# Altium PCB EDP_new_pcb.PcbDoc
Units mm, origin at the board's own origin, x right, y up, seen from the top; angles counter-clockwise.
Board outline 45 x 45 mm, 2 copper layers (Top Layer, Bottom Layer); 31 components, 22 nets, 150 pads, 38 vias.
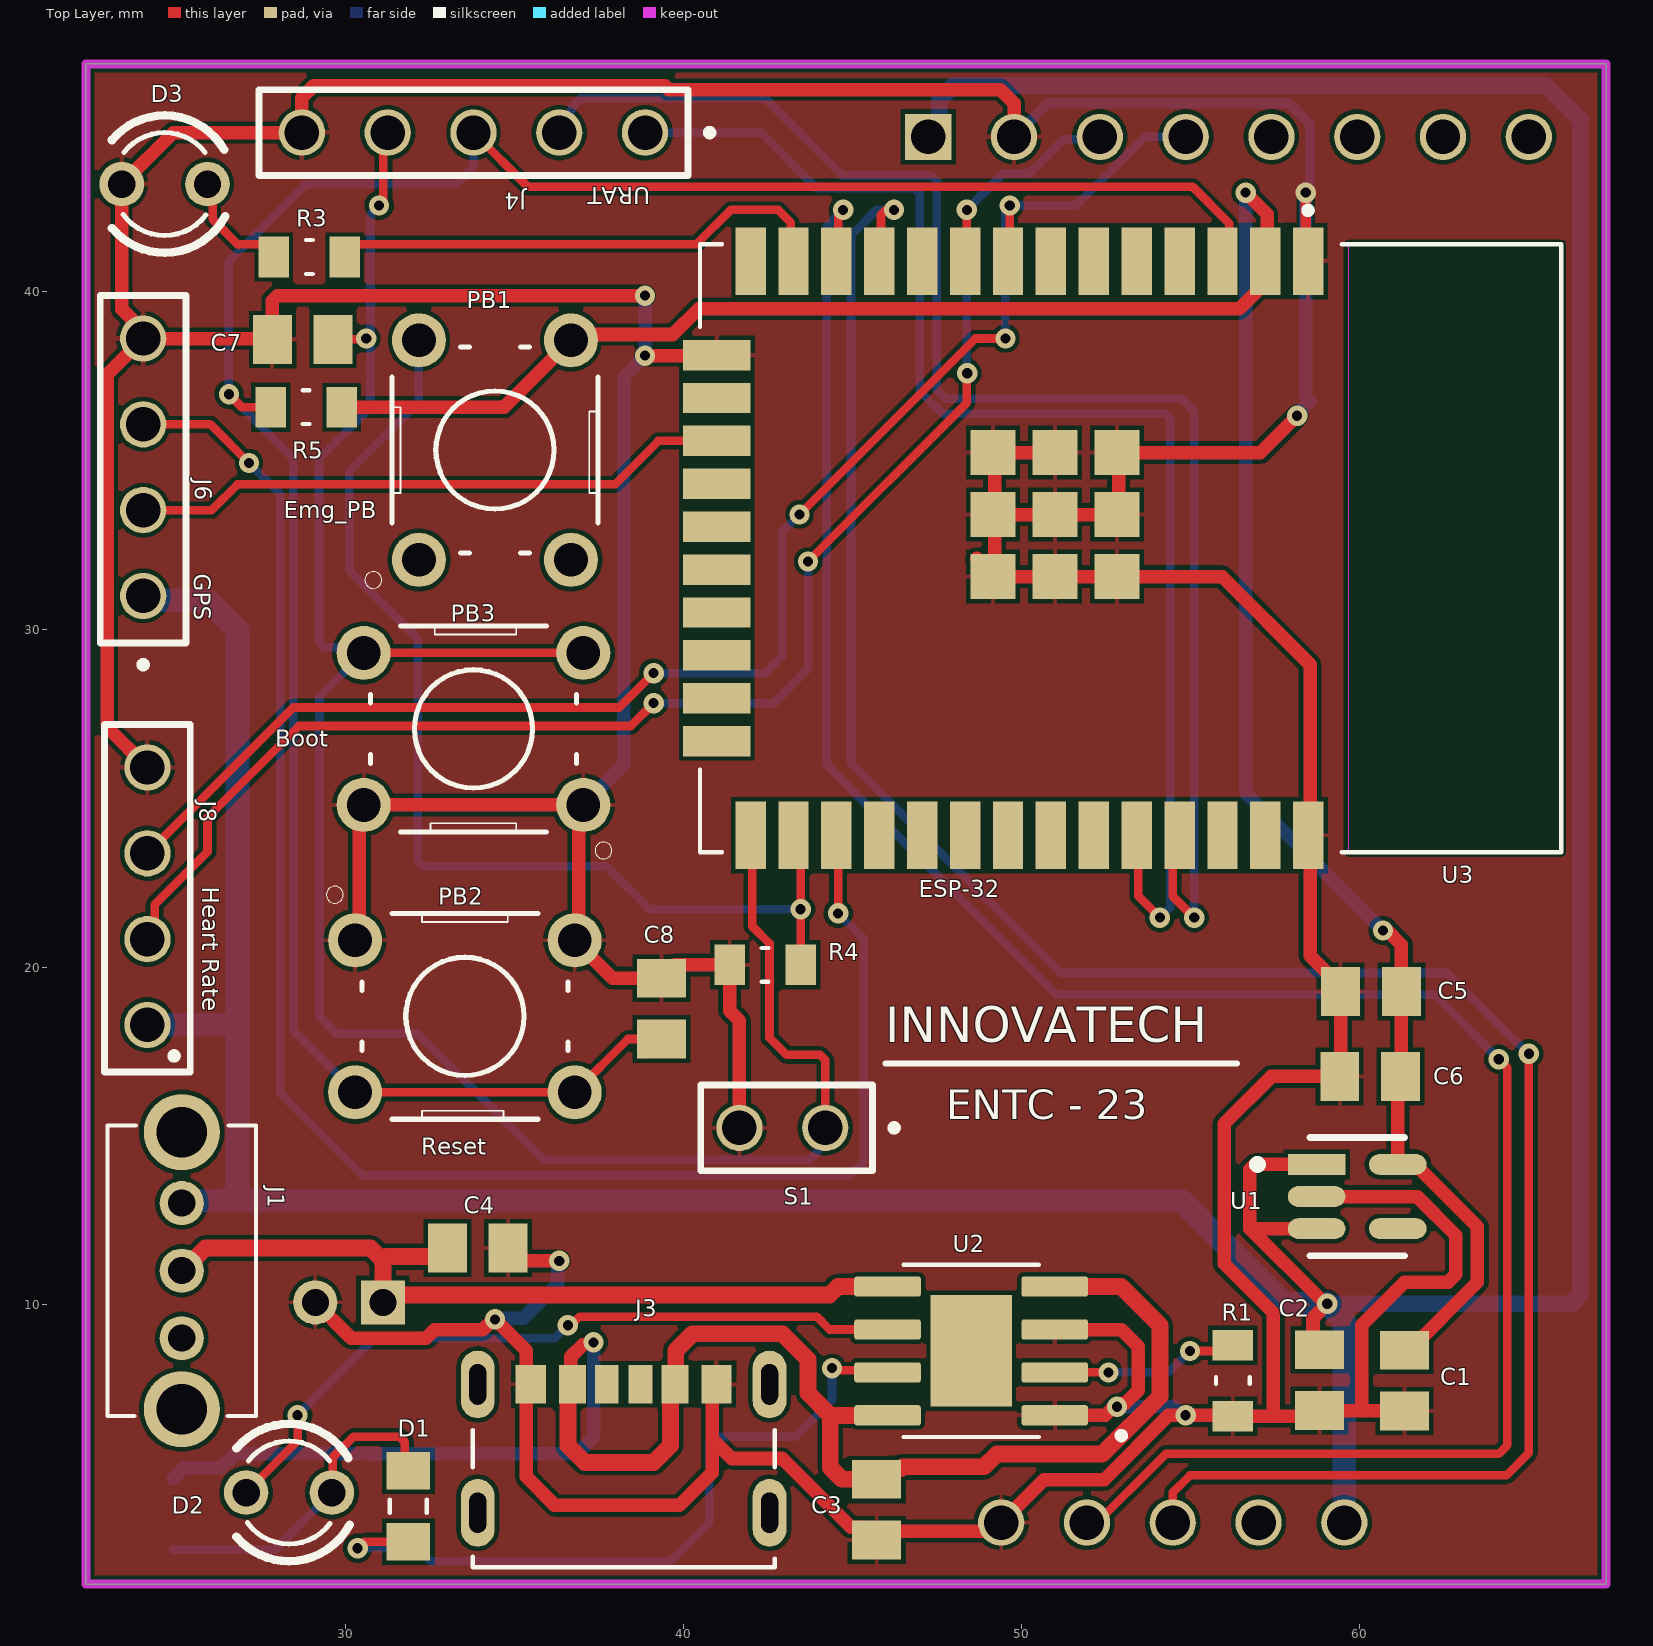
[diagram p0: Top Layer view]
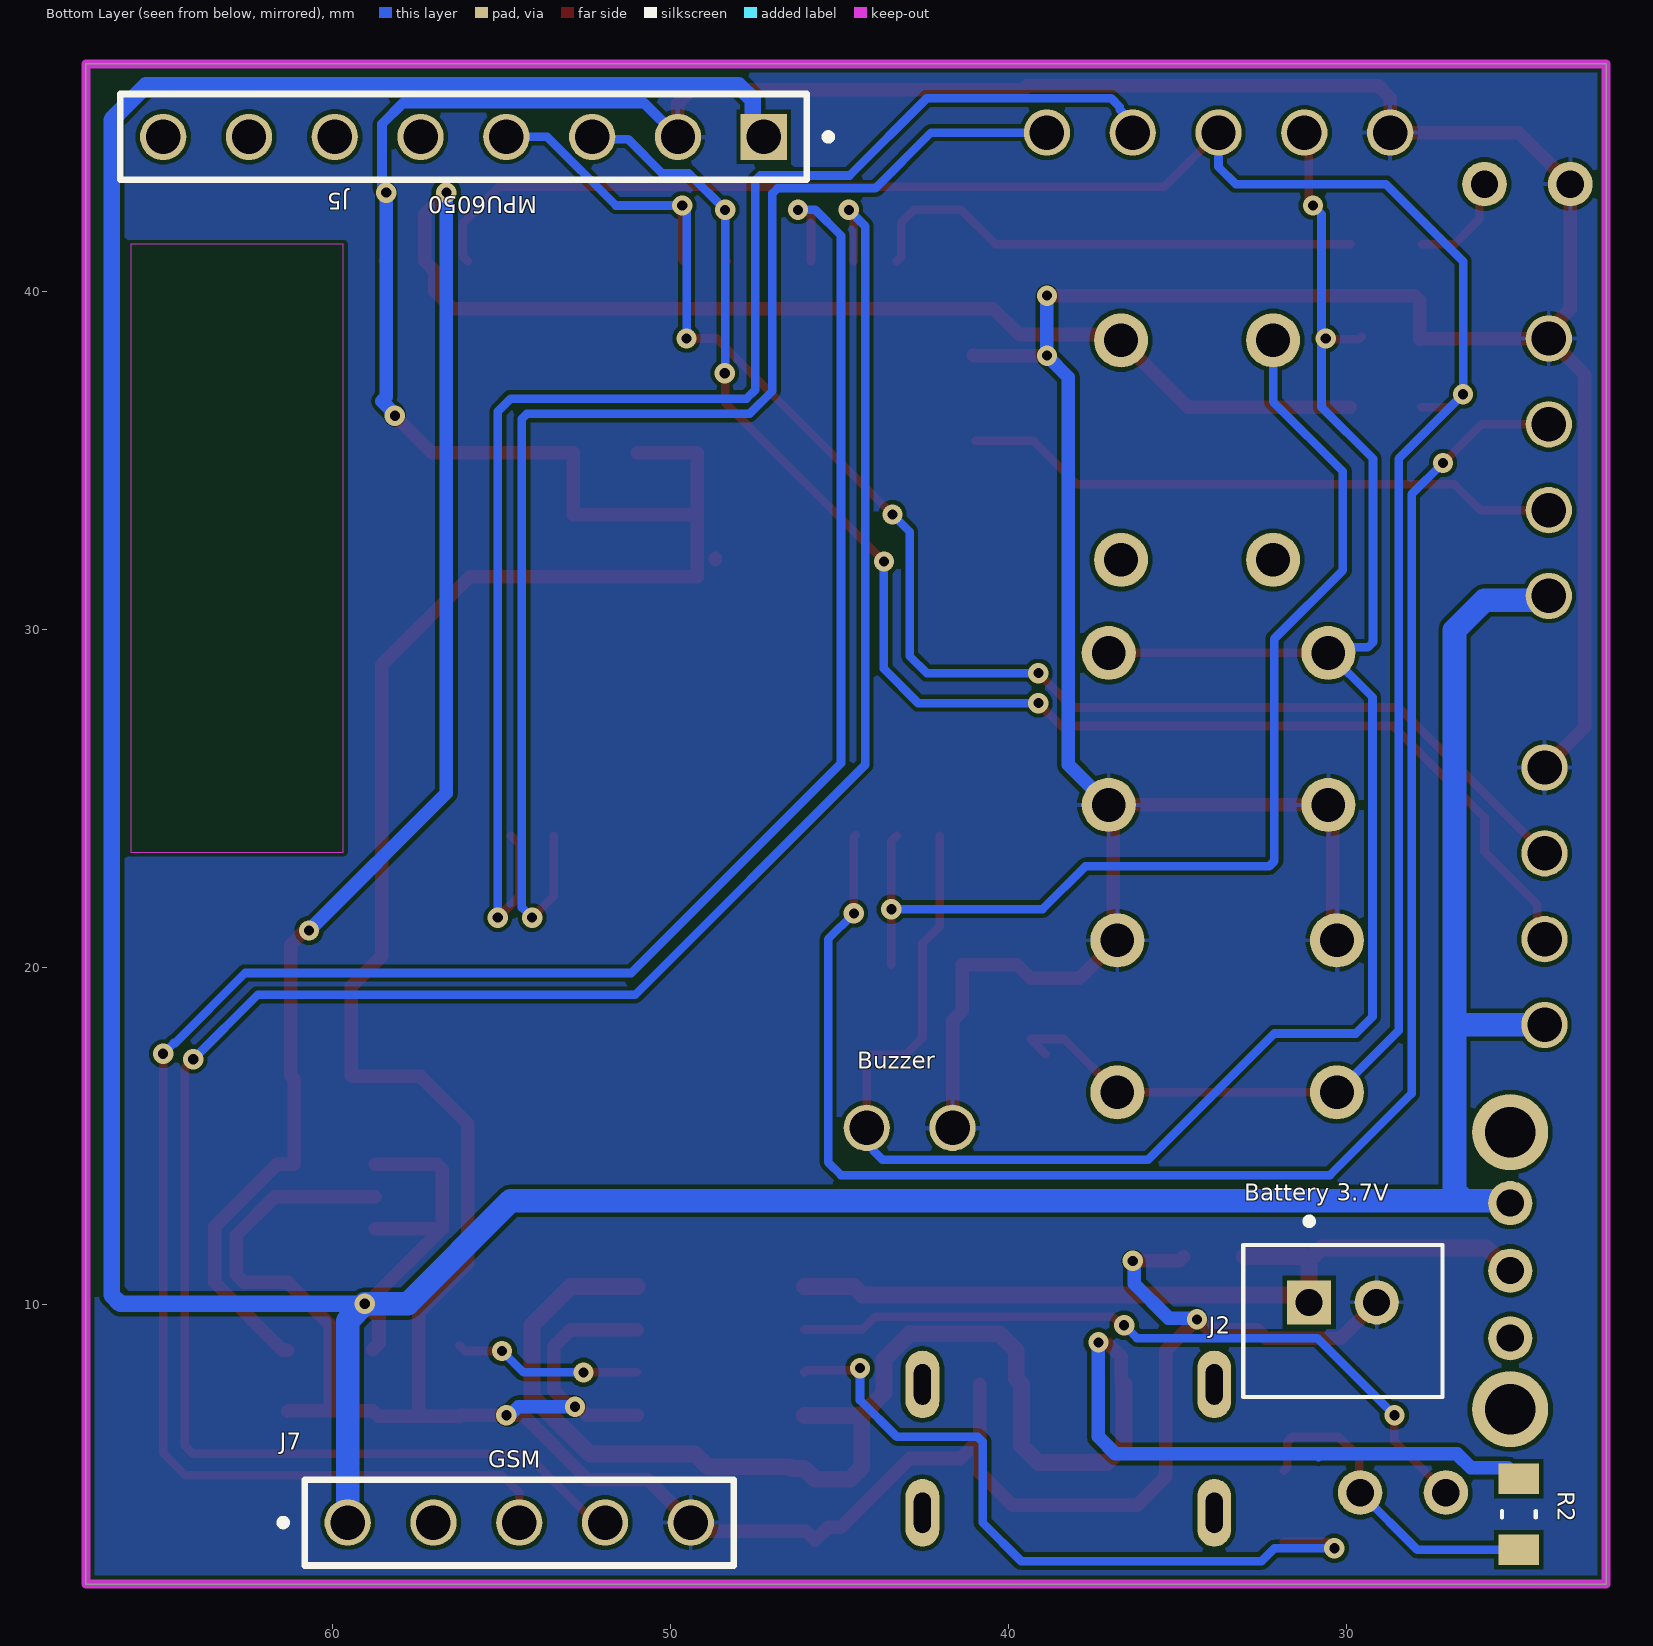
[diagram p1: Bottom Layer view, seen from below]
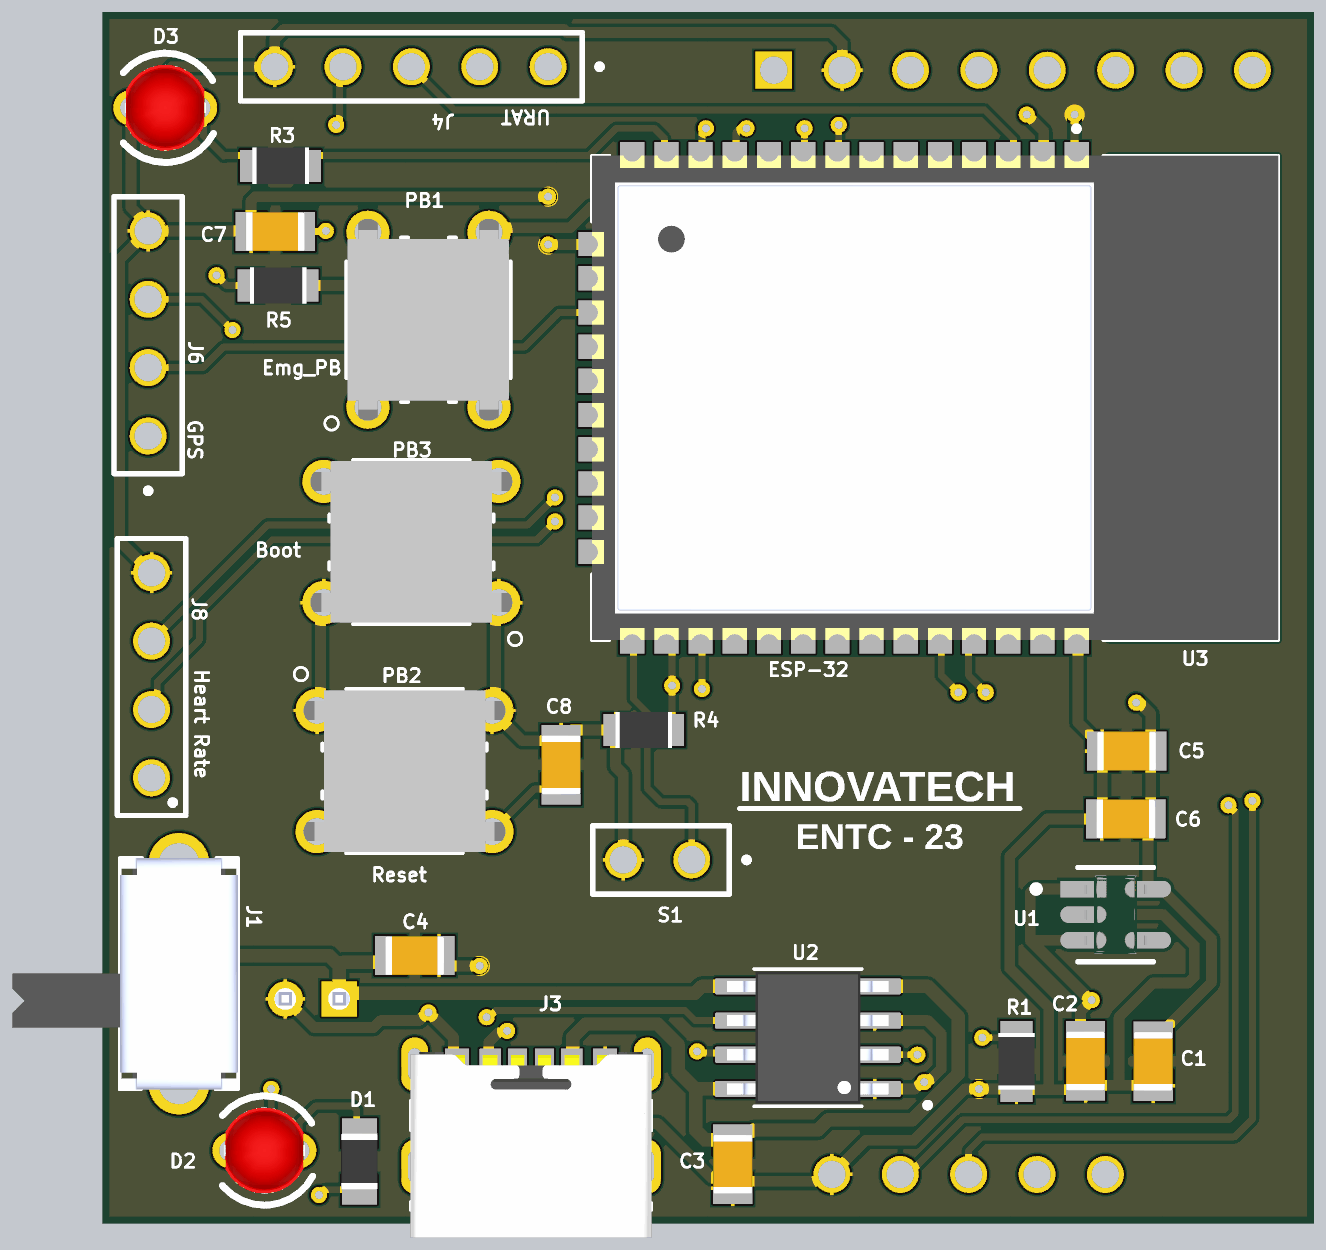
[diagram p2: 3D render of the assembled board from above, using the file's embedded part models]

## Layer stack, top to bottom
Top Solder: solder mask 0.0102, Solder Resist, Dk 3.5
Top Layer: signal copper 0.0356
Dielectric 1: dielectric 0.32, FR-4, Dk 4.8
Bottom Layer: signal copper 0.0356
Bottom Solder: solder mask 0.0102, Solder Resist, Dk 3.5

## Board outline
22.31,1.736 22.31,46.736 67.31,46.736 67.31,1.736

## Design rules (kind name [scope] priority, off if disabled: settings)
BoardOutlineClearance [All] p1: gap=0.2 ignorepadtopadclearanceinfootprint=FALSE
Clearance [All] p1: gap=0.127 ignorepadtopadclearanceinfootprint=FALSE except(0.25: Arc-Hole Track-Hole SMDPad-Hole THPad-Hole Via-Hole Fill-Hole Poly-Hole Region-Hole Text-Hole)
ComponentClearance [All] p1: gap=0.127 collisioncheckmode=3 verticalgap=0.127 showdistances=TRUE
DiffPairsRouting [All] p1: maxlimit=0.254 minlimit=0.127 mostfreqgap=0.127 toplayer_minwidth=0.127 toplayer_maxwidth=25.4 toplayer_prefwidth=0.127 bottomlayer_minwidth=0.127 bottomlayer_maxwidth=25.4 bottomlayer_prefwidth=0.127 maxuncoupledlength=12.7
Height [All] p1: minheight=0 maxheight=1816.048 prefheight=12.7
HoleSize [All] p1: absolutevalues=TRUE maxlimit=6.3 minlimit=0.3 maxpercent=80.000 minpercent=20.000
HoleToHoleClearance [All] p1: gap=0.25 allowstackedmicrovias=FALSE
MinimumAnnularRing [All] p1: minimumring=0.076
MinimumSolderMaskSliver [All] p1: minsoldermaskwidth=0
PlaneClearance [All] p1: clearance=0.127
PlaneConnect PlaneConnectPowerPads [InPadClass('PowerPads')] p1: planeconnectstyle=Direct reliefexpansion=0.508 reliefentries=4 reliefconductorwidth=0.254 reliefairgap=0.254
PlaneConnect [All] p2: pad.planeconnectstyle=Relief pad.reliefexpansion=0.3 pad.reliefentries=4 pad.reliefconductorwidth=0.127 pad.reliefairgap=0.127 via.planeconnectstyle=Direct via.reliefexpansion=0.3 via.reliefentries=4 via.reliefconductorwidth=0.127 via.reliefairgap=0.127
PolygonConnect PolygonConnectPowerPads [All vs (InPadClass('PowerPads'))] p1: connectstyle=Direct reliefconductorwidth=0.254 reliefentries=4 polygonreliefangle="90 Angle" airgapwidth=0.254
PolygonConnect [All] p2: thpad.connectstyle=Relief thpad.reliefconductorwidth=0.127 thpad.reliefentries=4 thpad.polygonreliefangle="90 Angle" thpad.airgapwidth=0.127 smdpad.connectstyle=Relief smdpad.reliefconductorwidth=0.127 smdpad.reliefentries=4 smdpad.polygonreliefangle="90 Angle" smdpad.airgapwidth=0.127 via.connectstyle=Direct via.reliefconductorwidth=0.127 via.reliefentries=4 via.polygonreliefangle="90 Angle" via.airgapwidth=0.127
RoutingVias [All] p1: holewidth=0.3 width=0.6 viastyle="Through Hole" minholewidth=0.3 minwidth=0.6 maxholewidth=0.6 maxwidth=6.6
SilkToSilkClearance [All] p1: silktosilkclearance=0
SilkToSolderMaskClearance [IsPad] p1: minsilkscreentomaskgap=0.127 clearancetoexposedcopper=TRUE
SolderMaskExpansion [All] p1: expansion=0.075 istentingtop=FALSE
SupplyNets "Schematic Supply Nets_1" [InNet('GND')] p1: voltage=0.000
SupplyNets "Schematic Supply Nets_2" [InNet('VCC')] p2: voltage=0.000
SupplyNets "Schematic Supply Nets" [InNet('+5')] p3: voltage=0.000
Width [All] p1: maxlimit=25.4 minlimit=0.127 preferedwidth=0.254 minimp=50.000000 maximp=50.000000 favimp=50.000000
20 further rules are at their usual default settings.

## Classes and differential pairs
polygon class PolygonClass_10: GND_L01_P000
component class EDP_new_schematic: C1 C2 C3 C4 C5 C6 C7 C8 D1 D2 D3 J1 J2 J3 J4 J5 J6 J7 J8 PB1 PB2 R1 R2 R3 R4 R5 S1 U1 U2

## Components (designator, comment, footprint, x,y, rotation, side; value= is the part's Value field where it differs from the comment)
C1 "C0805C105K4RACTU" C0805C105K4RACTU 61.316,7.733 r90 top value=1uF
C2 "C0805C105K4RACTU" C0805C105K4RACTU 58.801,7.747 r90 top value=1uF
C3 "C0805C106K3PACTU" C0805C106K3PACTU 45.72,3.937 r270 top value=10uF
C4 "C0805C106K3PACTU" C0805C106K3PACTU 33.909,11.684 r180 top value=10uF
C5 "C0805C104K5RACTU" C0805C104K5RACTU 59.944,19.685 r0 top value=100nF
C6 "C0805C106K3PACTU" C0805C106K3PACTU 60.325,16.764 r0 top value=10uF
C7 "C0805C104K5RACTU" C0805C104K5RACTU 28.321,38.989 r0 top value=100nF
C8 "C0805C104K5RACTU" C0805C104K5RACTU 39.751,19.177 r270 top value=100nF
D1 "LED" 150080RS75000 32.004,4.064 r270 top
D2 "LED" TLLR4400 28.448,4.572 r180 top
D3 "LED" TLLR4400 24.765,43.307 r180 top
J1 "OS102011MA1QN1" OS102011MA1QN1_connector 23.495,10.759 r270 top
J2 "B2B-PH-K-S (LF)(SN)" "B2B-PH-K-S (LF)(SN)" 29.972,9.144 r0 bottom
J3 "USB-TYPE-C-009" USB-TYPE-C-009 38.1,4.572 r0 top
J4 "USB-TTL" USB-TTL 38.481,44.323 r0 top
J5 "MPU-6050" MPU-6050 55.499,44.704 r180 bottom
J6 "NEO6M-GPS" NEO6M-GPS 24.003,29.972 r270 top
J7 "SIM800L" SIM800L 54.483,3.683 r0 bottom
J8 "MAX30102" MAX30102_connector 24.13,17.272 r270 top
PB1 "B3F-1000" SW_B3F-1000 34.417,35.306 r90 top
PB2 "B3F-1000" SW_B3F-1000 33.528,18.542 r0 top
PB3 "B3F-1000" SW_B3F-1000 33.782,27.051 r180 top
R1 "RC0805FR-071K5L" RC0805FR-071K5L 56.134,7.874 r90 top value=1.5kR
R2 "RC0805FR-071KL" RC0805FR-071KL 24.892,3.683 r270 bottom value=1kR
R3 "RC0805FR-071K5L" RC0805FR-071K5L 28.803,40.894 r180 top value=1.5kR
R4 "RC0805JR-0710KL" RC0805JR-0710KL 42.418,20.066 r0 top value=10kR
R5 "RC0805JR-0710KL" RC0805JR-0710KL 28.829,36.576 r0 top value=10kR
S1 "Speaker" Speaker 38.354,13.335 r0 top
U1 "AP2112K-3.3TRG1" FP-SOT25-IPC_A 59.944,13.208 r0 top
U2 "TP4056" TP4056_chip 48.26,8.636 r180 top
U3 "ESP32-WROOM-32" ESP32-WROOM-32_chip 51.078,32.528 r270 top

## Footprints (in the part's own frame and the unit in brackets; to place one, negate y for a bottom-side part, rotate by r counter-clockwise, add the part's x,y. Pads: shape width x height; smd on the part's side, far side on the other; paste and mask are expansions set on the pad)
150080RS75000 [mm]
  rect 1.1x1.3 smd: 1(-1.025,-0.152) 2(1.075,-0.152)
  silkscreen extent -0.17,-0.7 0.23,0.4, body extent -1.02,-0.83 1.08,0.52, height 0.8
"B2B-PH-K-S (LF)(SN)" [mm]
  rect 1.308x1.308 / inner round 1.308 / far side rect 1.308x1.308 hole 0.8: 1(1.127,-0.931)
  round 1.308 hole 0.8: 2(-0.873,-0.931)
  silkscreen extent -2.82,-3.43 3.08,1.87, body extent -2.82,-2.63 3.08,1.87, height 6
C0805C104K5RACTU [mm]
  rect 1.15x1.45 smd: 1(-0.494,-0.406) 2(1.306,-0.406)
  body extent -0.69,-1.13 1.51,0.32, height 1.45
C0805C105K4RACTU [mm]
  rect 1.15x1.45 smd: 1(-0.875,-0.025) 2(0.925,-0.025)
  body extent -1.07,-0.75 1.13,0.7, height 1.45
C0805C106K3PACTU [mm]
  rect 1.15x1.45 smd: 1(-0.9,0) 2(0.9,0)
  body extent -1.1,-0.72 1.1,0.72, height 1.45
ESP32-WROOM-32_chip [mm]
  rect 2x0.9 smd: 1(-8.373,7.419) 2(-8.373,6.149) 3(-8.373,4.879) 4(-8.373,3.609) 5(-8.373,2.339) 6(-8.373,1.069) 7(-8.373,-0.201) 8(-8.373,-1.471) 9(-8.373,-2.741) 10(-8.373,-4.011) 11(-8.373,-5.281) 12(-8.373,-6.551) 13(-8.373,-7.821) 14(-8.373,-9.091) 25(8.627,-9.091) 26(8.627,-7.821) 27(8.627,-6.551) 28(8.627,-5.281) 29(8.627,-4.011) 30(8.627,-2.741) 31(8.627,-1.471) 32(8.627,-0.201) 33(8.627,1.069) 34(8.627,2.339) 35(8.627,3.609) 36(8.627,4.879) 37(8.627,6.149) 38(8.627,7.419)
  rect 0.9x2 smd: 15(-5.588,-10.091) 16(-4.318,-10.091) 17(-3.048,-10.091) 18(-1.778,-10.091) 19(-0.508,-10.091) 20(0.762,-10.091) 21(2.032,-10.091) 22(3.302,-10.091) 23(4.572,-10.091) 24(5.842,-10.091)
  rect 1.33x1.33 smd: 39_1(-2.708,1.754) 39_2(-0.873,1.754) 39_3(0.962,1.754) 39_4(-2.708,-0.081) 39_5(-0.873,-0.081) 39_6(0.962,-0.081) 39_7(-2.708,-1.916) 39_8(-0.873,-1.916) 39_9(0.962,-1.916)
  Keep-Out Layer region: 9.127,8.609 -8.873,8.609 -8.873,14.909 9.127,14.909
  Keep-Out Layer region: 9.127,8.609 -8.873,8.609 -8.873,14.909 9.127,14.909
  silkscreen extent -9.97,-10.59 9.13,14.91, body extent -8.87,-10.59 9.13,14.91, height 3.2
FP-SOT25-IPC_A [mm]
  rect 1.707x0.616 smd paste+0 mask+0: 1(-1.201,0.95)
  rrect100% 1.707x0.616 smd paste+0 mask+0: 2(-1.201,0) 3(-1.201,-0.95) 4(1.201,-0.95) 5(1.201,0.95)
  silkscreen extent -3.08,-1.75 1.4,1.75, body extent -2.55,-2 2.55,2, height 0.25
MAX30102_connector [mm]
  round 1.37 hole 1.02: 01(-1.016,0) 02(-3.556,0) 03(-6.096,0) 04(-8.636,0)
  silkscreen extent -9.91,-1.27 0.38,1.27
MPU-6050 [mm]
  rect 1.37x1.37 / inner round 1.37 / far side rect 1.37x1.37 hole 1.02: 01(8.255,-0.127)
  round 1.37 hole 1.02: 02(5.715,-0.127) 03(3.175,-0.127) 04(0.635,-0.127) 05(-1.905,-0.127) 06(-4.445,-0.127) 07(-6.985,-0.127) 08(-9.525,-0.127)
  silkscreen extent -10.79,-1.4 10.26,1.14
NEO6M-GPS [mm]
  round 1.37 hole 1.02: 01(-1.016,0) 02(-3.556,0) 03(-6.096,0) 04(-8.636,0)
  silkscreen extent -9.91,-1.27 1.12,1.27
OS102011MA1QN1_connector [mm]
  round 1.308 hole 0.8: 1(-2.254,1.651) 2(-0.254,1.651) 3(1.746,1.651)
  round 2.25 hole 1.5: G1(-4.354,1.651) G2(3.846,1.651)
  silkscreen extent -4.55,-0.55 4.05,3.85, body extent -4.56,-4.53 4.05,3.85, height 4.7
RC0805FR-071K5L [mm]
  rect 0.9x1.2 smd: 1(-1.169,-0.127) 2(0.931,-0.127)
  silkscreen extent -0.22,-0.63 -0.02,0.37, body extent -1.17,-0.8 0.93,0.55, height 0.6
RC0805FR-071KL [mm]
  rect 0.9x1.2 smd: 1(-1.169,0) 2(0.931,0)
  silkscreen extent -0.22,-0.5 -0.02,0.5, body extent -1.17,-0.67 0.93,0.67, height 0.6
RC0805JR-0710KL [mm]
  rect 0.9x1.2 smd: 1(-1.05,0) 2(1.05,0)
  silkscreen extent -0.1,-0.5 0.1,0.5, body extent -1.05,-0.67 1.05,0.67, height 0.6
SIM800L [mm]
  round 1.37 hole 1.02: 01(5.08,0.127) 02(2.54,0.127) 03(0,0.127) 04(-2.54,0.127) 05(-5.08,0.127)
  silkscreen extent -6.35,-1.14 7.09,1.4
Speaker [mm]
  round 1.37 hole 1.02: N(3.302,1.905) P(5.842,1.905)
  silkscreen extent 2.16,0.64 7.98,3.17
SW_B3F-1000 [mm]
  round 1.6 hole 1: 1(-3.25,2.25) 2(3.25,2.25) 3(-3.25,-2.25) 4(3.25,-2.25)
  silkscreen extent -4.1,-3.05 3.05,3.85, body extent -3.85,-3 3.85,3, height 4.3
TLLR4400 [mil]
  round 52 hole 32: A(-45,5) K(55,5)
  silkscreen extent -66,-75 66,85, body extent -55,-58 65,68, height 240
TP4056_chip [mm]
  rrect25% 1.97x0.6 smd: 1(-2.729,1.905) 2(-2.729,0.635) 3(-2.729,-0.635) 4(-2.729,-1.905) 5(2.221,-1.905) 6(2.221,-0.635) 7(2.221,0.635) 8(2.221,1.905)
  rect 2.413x3.302 smd paste-3: 9(-0.254,0)
  silkscreen extent -4.8,-2.55 1.75,2.6, body extent -3.25,-2.45 2.75,2.45, height 1.75
USB-TTL [mm]
  round 1.37 hole 1.02: 01(0.381,0.381) 02(-2.159,0.381) 03(-4.699,0.381) 04(-7.239,0.381) 05(-9.779,0.381)
  silkscreen extent -11.05,-0.89 2.39,1.65
USB-TYPE-C-009 [mm]
  rect 0.7x1.15 smd: A5(-0.373,3.078) B5(0.627,3.078)
  rect 0.8x1.15 smd: A9(1.647,3.078) B9(-1.393,3.078)
  rect 0.9x1.15 smd: A12(2.877,3.078) B12(-2.623,3.078)
  oval 1x2 hole 0.5 slot 1.2 at 90 deg: S1(-4.193,3.073) S2(4.447,3.073) S3(-4.193,-0.727) S4(4.447,-0.727)
  silkscreen extent -4.34,-2.34 4.6,1.72, body extent -4.34,-3.37 4.6,3.53, height 3.23

## Part data
C1 C2: "Ceramic Capacitor, Multilayer, Ceramic, 16V, 10% +Tol, 10% -Tol, X7R, 15% TC, 1uF, Surface Mount, 0805", Capacitor Type=Ceramic, Case/Package=0805, Manufacturer=KEMET, Max Operating Temperature=125°C, Min Operating Temperature=-55°C, Package Shape=Rectangular, Package Style=SMTMeter, Rated DC Voltage (URdc)=16V, Supplier Part Number=399-C0805C105K4RACTUCT-ND, Temperature Characteristics Code=X7R, Tolerance  (fill in as +-)=10%, Category="Ceramic Capacitors", ComponentLink1Description=https://datasheet.ciiva.com:443/pdfs/VipMasterIC/IC/KEME/KEME-S-A0008991654/KEME-S-A0008991654-1.pdf?src-supplier=IHS+Markit, ComponentLink1URL=https://datasheet.ciiva.com:443/pdfs/VipMasterIC/IC/KEME/KEME-S-A0008991654/KEME-S-A0008991654-1.pdf?src-supplier=IHS+Markit, ComponentLink2Description=https://datasheet.ciiva.com/6074/1722731-6074364.pdf?src-supplier=Farnell, ComponentLink2URL=https://datasheet.ciiva.com/6074/1722731-6074364.pdf?src-supplier=Farnell, ComponentLink3Description=https://datasheet.ciiva.com/28692/1851736-28692942.pdf?src-supplier=Element14, ComponentLink3URL=https://datasheet.ciiva.com/28692/1851736-28692942.pdf?src-supplier=Element14, ComponentLink4Description=https://datasheet.ciiva.com/14585/70095383-14585511.pdf?src-supplier=Allied+Electronics, ComponentLink4URL=https://datasheet.ciiva.com/14585/70095383-14585511.pdf?src-supplier=Allied+Electronics, ComponentLink5Description=https://datasheet.ciiva.com/14603/70095383-14603388.pdf?src-supplier=Allied+Electronics, ComponentLink5URL=https://datasheet.ciiva.com/14603/70095383-14603388.pdf?src-supplier=Allied+Electronics, ComponentLink6Description=https://datasheet.ciiva.com/45846/docfinderpartnumberc0402c102k5ractu-45846934.pdf?src-supplier=Onlinecomponents.com, ComponentLink6URL=https://datasheet.ciiva.com/45846/docfinderpartnumberc0402c102k5ractu-45846934.pdf?src-supplier=Onlinecomponents.com, Dielectric Material=Ceramic, Height=0.9mm, JESD-609 Code=e3, Length=2mm, Manufacturer Part Number=C0805C105K4RACTU, Mounting Technology="Surface Mount", Multilayer=Yes, Packaging="Tape and Reel", Pins=2, Pricing="1=0.12, 10=0.068, 100=0.041, 1000=0.03184 (USD)", Reach SVHC Compliant=Yes, RoHS=Yes, RoHS Compliant=Yes, Stock=386670, Supplier=Digikey, Terminal Finish=Nickel, Termination=Wraparound, Tolerance (fill in as +-)=10%, Width=1.25mm
C3 C4 C6: "Ceramic Capacitor, Multilayer, Ceramic, 25V, 10% +Tol, 10% -Tol, X5R, 15% TC, 10uF, Surface Mount, 0805", Capacitor Type=Ceramic, Case/Package=0805, Manufacturer=KEMET, Max Operating Temperature=85°C, Min Operating Temperature=-55°C, Package Shape=Rectangular, Rated DC Voltage (URdc)=25V, Supplier Part Number=399-11939-6-ND, Temperature Characteristics Code=X5R, Tolerance  (fill in as +-)=10%, Category="Ceramic Capacitors", ComponentLink1Description=https://datasheet.ciiva.com:443/pdfs/VipMasterIC/IC/KEME/KEME-S-A0008991665/KEME-S-A0008991665-1.pdf?src-supplier=IHS+Markit, ComponentLink1URL=https://datasheet.ciiva.com:443/pdfs/VipMasterIC/IC/KEME/KEME-S-A0008991665/KEME-S-A0008991665-1.pdf?src-supplier=IHS+Markit, ComponentLink2Description=http://www.farnell.com/datasheets/2741185.pdf?src-supplier=Farnell, ComponentLink2URL=http://www.farnell.com/datasheets/2741185.pdf?src-supplier=Farnell, ComponentLink3Description=https://datasheet.octopart.com/C0805C106K3PACTU-KEMET-datasheet-81638446.pdf?src-supplier=Newark, ComponentLink3URL=https://datasheet.octopart.com/C0805C106K3PACTU-KEMET-datasheet-81638446.pdf?src-supplier=Newark, ComponentLink4Description=https://api.kemet.com/component-edge/download/datasheet/C0805C106K3PAC7800.pdf?src-supplier=Digikey, ComponentLink4URL=https://api.kemet.com/component-edge/download/datasheet/C0805C106K3PAC7800.pdf?src-supplier=Digikey, ComponentLink5Description=http://www.farnell.com/datasheets/2741185.pdf?src-supplier=Newark, ComponentLink5URL=http://www.farnell.com/datasheets/2741185.pdf?src-supplier=Newark, ComponentLink6Description=http://www.farnell.com/datasheets/2741185.pdf?src-supplier=Element14, ComponentLink6URL=http://www.farnell.com/datasheets/2741185.pdf?src-supplier=Element14, ComponentLink7Description=https://datasheet.octopart.com/C0805C106K3PACTU-Kemet-datasheet-46909776.pdf?src-supplier=Element14, ComponentLink7URL=https://datasheet.octopart.com/C0805C106K3PACTU-Kemet-datasheet-46909776.pdf?src-supplier=Element14, Dielectric Material=Ceramic, JESD-609 Code=e3, Manufacturer Part Number=C0805C106K3PACTU, Mounting Technology="Surface Mount", Multilayer=Yes, Packaging="Tape and Reel", Pins=2, Pricing="1=0.22, 10=0.126, 100=0.0793, 1000=0.05524 (USD)", Reach SVHC Compliant=Yes, RoHS=Yes, RoHS Compliant=Yes, Stock=59183, Supplier=Digikey, Terminal Finish=Nickel, Termination=Wraparound, Tolerance (fill in as +-)=10%
C5 C7 C8: "Ceramic Capacitor, Multilayer, Ceramic, 50V, 10% +Tol, 10% -Tol, X7R, 15% TC, 0.1uF, Surface Mount, 0805", Capacitor Type=Ceramic, Case/Package=0805, Manufacturer=KEMET, Max Operating Temperature=125°C, Min Operating Temperature=-55°C, Package Shape=Rectangular, Package Style=SMTMeter, Rated DC Voltage (URdc)=50V, Supplier Part Number=399-C0805C104K5RACTUTR-ND, Temperature Characteristics Code=X7R, Tolerance  (fill in as +-)=10%, Category="Ceramic Capacitors", ComponentLink1Description=https://datasheet.ciiva.com:443/pdfs/VipMasterIC/IC/KEME/KEME-S-A0008991654/KEME-S-A0008991654-1.pdf?src-supplier=IHS+Markit, ComponentLink1URL=https://datasheet.ciiva.com:443/pdfs/VipMasterIC/IC/KEME/KEME-S-A0008991654/KEME-S-A0008991654-1.pdf?src-supplier=IHS+Markit, ComponentLink2Description=https://datasheet.ciiva.com/32431/slceramic-chip-condensers-e-32431755.pdf?src-supplier=Distrelec, ComponentLink2URL=https://datasheet.ciiva.com/32431/slceramic-chip-condensers-e-32431755.pdf?src-supplier=Distrelec, ComponentLink3Description=https://datasheet.ciiva.com/28682/1851736-28682232.pdf?src-supplier=Element14, ComponentLink3URL=https://datasheet.ciiva.com/28682/1851736-28682232.pdf?src-supplier=Element14, ComponentLink4Description=https://datasheet.ciiva.com/18410/70095383-18410815.pdf?src-supplier=Allied+Electronics, ComponentLink4URL=https://datasheet.ciiva.com/18410/70095383-18410815.pdf?src-supplier=Allied+Electronics, ComponentLink5Description=https://datasheet.ciiva.com/14589/70095383-14589048.pdf?src-supplier=Allied+Electronics, ComponentLink5URL=https://datasheet.ciiva.com/14589/70095383-14589048.pdf?src-supplier=Allied+Electronics, Dielectric Material=Ceramic, Height=0.78mm, JESD-609 Code=e3, Length=2mm, Manufacturer Part Number=C0805C104K5RACTU, Mounting Technology="Surface Mount", Multilayer=Yes, Packaging="Tape and Reel", Pins=2, Pricing="4000=0.0224, 8000=0.016, 12000=0.0148 (USD)", Reach SVHC Compliant=Yes, RoHS=Yes, RoHS Compliant=Yes, Stock=495390, Supplier=Digikey, Terminal Finish=Nickel, Termination=Wraparound, Tolerance (fill in as +-)=10%, Width=1.25mm
D1: library part 150080RS75000, "Single Color LED, Red, Water Clear, 1.4mm", Color=Red, Forward Current=30mA, Manufacturer="Wurth Electronics", Max Operating Temperature=85°C, Min Operating Temperature=-40°C, Supplier Part Number=732-4984-1-ND, Category=LEDs, Channels=1, ComponentLink1Description=https://datasheet.ciiva.com:443/pdfs/VipMasterIC/IC/MIDC/MIDC-S-A0007455974/MIDC-S-A0007455974-1.pdf?src-supplier=IHS+Markit, ComponentLink1URL=https://datasheet.ciiva.com:443/pdfs/VipMasterIC/IC/MIDC/MIDC-S-A0007455974/MIDC-S-A0007455974-1.pdf?src-supplier=IHS+Markit, ComponentLink2Description=https://datasheet.ciiva.com/22656/150080rs75000-22656961.pdf?src-supplier=Element14, ComponentLink2URL=https://datasheet.ciiva.com/22656/150080rs75000-22656961.pdf?src-supplier=Element14, ComponentLink3Description=https://datasheet.ciiva.com/29279/759435-da-01-en-chipled-0805-w-kl-rot-150080rs75000-29279032.pdf?src-supplier=Conrad, ComponentLink3URL=https://datasheet.ciiva.com/29279/759435-da-01-en-chipled-0805-w-kl-rot-150080rs75000-29279032.pdf?src-supplier=Conrad, Lens Style="WATER CLEAR", Luminous Intensity-Nom=150mcd, Manufacturer Part Number=150080RS75000, Mounting Technology="Surface Mount", Optoelectronic Device Type="SINGLE COLOR LED", Overall Height=0.7mm, Packaging="Tape and Reel", Pins=2, Pricing="1=0.19, 50=0.176, 100=0.151, 500=0.14688 (USD)", Reach SVHC Compliant=Yes, RoHS=Yes, RoHS Compliant=Yes, Shape=Rectangular, Size=1.4mm, Stock=56216, Supplier=Digikey, Terminal Pitch=2.1mm, Viewing Angle=140°
D2 D3: library part TLLR4400, "LED; Red; 1.2mcd; 3.2mmDia.; T-1; 7mA; 1.9V; 635nm; +/-25deg; GaAsP on GaP; 15V", Manufacturer=Vishay, Category=LEDs, ComponentLink1Description=https://datasheet.ciiva.com/11774/0900766b80e22d14-11774062.pdf?src-supplier=Rs, ComponentLink1URL=https://datasheet.ciiva.com/11774/0900766b80e22d14-11774062.pdf?src-supplier=Rs, Manufacturer Part Number=TLLR4400, Pricing="1=0.4975, 10=0.3483, 100=0.26, 500=0.2194, 1000=0.2024, 5000=0.19, 10000=0.156, 25000=0.1526 (USD)", RoHS=No, Stock=6346, Supplier="Arrow Electronics", Supplier Part Number=TLLR4400
J2: "Board Connector, 2 Contact(s), 1 Row(s), Male, Straight, 0.079 inch Pitch, Solder Terminal, Locking, Natural Insulator", Manufacturer=JST, Manufacturer Part Number=B2B-PH-K-S(LF)(SN), Category="Headers and Wire Housings", ComponentLink1Description=https://datasheet.ciiva.com:443/pdfs/VipMasterIC/IC/JSTM/JSTM-S-A0007943211/JSTM-S-A0007943211-1.pdf?src-supplier=IHS+Markit, ComponentLink1URL=https://datasheet.ciiva.com:443/pdfs/VipMasterIC/IC/JSTM/JSTM-S-A0007943211/JSTM-S-A0007943211-1.pdf?src-supplier=IHS+Markit, ComponentLink2Description=https://datasheet.ciiva.com/11746/0900766b8082f551-11746676.pdf?src-supplier=Rs, ComponentLink2URL=https://datasheet.ciiva.com/11746/0900766b8082f551-11746676.pdf?src-supplier=Rs, ComponentLink3Description=https://datasheet.ciiva.com/16422/b2b-ph-k-slfsn-16422715.pdf?src-supplier=Future+Electronics, ComponentLink3URL=https://datasheet.ciiva.com/16422/b2b-ph-k-slfsn-16422715.pdf?src-supplier=Future+Electronics, Pricing="1=0.1137, 10=0.0604, 25=0.0597, 100=0.0592, 500=0.0585, 1000=0.0562 (USD)", RoHS=Yes, Stock=109655, Supplier="Arrow Electronics", Supplier Part Number=B2B-PH-K-S(LF)(SN)
J5: "Board Stacking Connector, 14 Contact(s), 1 Row(s), Male, Straight, Solder Terminal", Flammability Rating="UL94 V-0", Manufacturer=Samtec, Manufacturer Part Number=MTLW-114-07-T-S-235, Supplier Part Number=612-MTLW-114-07-T-S-235-ND, Category=Connectors, ComponentLink1Description=https://datasheet.ciiva.com:443/pdfs/VipMasterIC/IC/SAMI/SAMI-S-A0001769147/SAMI-S-A0001769147-1.pdf?src-supplier=IHS+Markit, ComponentLink1URL=https://datasheet.ciiva.com:443/pdfs/VipMasterIC/IC/SAMI/SAMI-S-A0001769147/SAMI-S-A0001769147-1.pdf?src-supplier=IHS+Markit, ComponentLink2Description=https://datasheet.ciiva.com/10029/mtlw-th-10029781.pdf?src-supplier=Avnet, ComponentLink2URL=https://datasheet.ciiva.com/10029/mtlw-th-10029781.pdf?src-supplier=Avnet, Connector Type="BOARD STACKING CONNECTOR", Contact Gender=Male, DIN Conformance=No, Filter Feature=No, IEC Conformance=No, MIL Conformance=No, Mixed Contacts=No, Mounting Style=STRAIGHT, Mounting Technology=Board, Number of Contacts=14, Number of Rows Loaded=1, Option="General Purpose", Pricing="1=1.97 (USD)", Reach SVHC Compliant=Yes, RoHS=Yes, RoHS Compliant=Yes, Supplier=Digikey, Terminal Pitch=2.54mm, Termination=Solder
R1 R3: "Fixed Resistor, Metal Glaze/thick Film, 0.125W, 1500ohm, 150V, 1% +/-Tol, 100ppm/Cel, Surface Mount, 0805", Case/Package=0805, Manufacturer=Yageo, Max Operating Temperature=155°C, Min Operating Temperature=-55°C, Package Height=0.5mm, Package Length=2mm, Package Shape=Rectangular, Package Width=1.25mm, Power=125mW, Rated Temperature=70°C, Resistor Type="FIXED RESISTOR", Supplier Part Number=311-1.50KCRCT-ND, Temperature Coefficient (ppm/Cel)=100, Tolerance=1%, Working Voltage=150V, Additional Feature="LASER TRIMMABLE", Category="Chip SMD Resistors", ComponentLink1Description=https://datasheet.ciiva.com:443/pdfs/VipMasterIC/IC/YAGO/YAGO-S-A0008145938/YAGO-S-A0008145938-1.pdf?src-supplier=IHS+Markit, ComponentLink1URL=https://datasheet.ciiva.com:443/pdfs/VipMasterIC/IC/YAGO/YAGO-S-A0008145938/YAGO-S-A0008145938-1.pdf?src-supplier=IHS+Markit, ComponentLink2Description=https://datasheet.ciiva.com/17423/rc0805-17423247.pdf?src-supplier=Future+Electronics, ComponentLink2URL=https://datasheet.ciiva.com/17423/rc0805-17423247.pdf?src-supplier=Future+Electronics, Construction=Chip, JESD-609 Code=e3, Manufacturer Part Number=RC0805FR-071K5L, Mounting Technology="Surface Mount", Packaging="Tape and Reel", Pins=2, Pricing="1=0.1, 10=0.012, 100=0.0112, 1000=0.00918, 2500=0.00686 (USD)", Reach SVHC Compliant=Yes, RoHS=Yes, RoHS Compliant=Yes, Stock=226709, Supplier=Digikey, Technology="METAL GLAZE/THICK FILM", Terminal Finish=Nickel, Termination=Wraparound
R2: "Fixed Resistor, Metal Glaze/thick Film, 0.125W, 1000ohm, 150V, 1% +/-Tol, 100ppm/Cel, Surface Mount, 0805", Case/Package=0805, Manufacturer=Yageo, Max Operating Temperature=155°C, Min Operating Temperature=-55°C, Package Height=0.5mm, Package Length=2mm, Package Shape=Rectangular, Package Width=1.25mm, Power=125mW, Rated Temperature=70°C, Resistor Type="FIXED RESISTOR", Supplier Part Number=311-1.00KCRTR-ND, Temperature Coefficient (ppm/Cel)=100, Tolerance=1%, Working Voltage=150V, Additional Feature="LASER TRIMMABLE", Category="Chip SMD Resistors", ComponentLink1Description=https://datasheet.ciiva.com:443/pdfs/VipMasterIC/IC/YAGO/YAGO-S-A0008145938/YAGO-S-A0008145938-1.pdf?src-supplier=IHS+Markit, ComponentLink1URL=https://datasheet.ciiva.com:443/pdfs/VipMasterIC/IC/YAGO/YAGO-S-A0008145938/YAGO-S-A0008145938-1.pdf?src-supplier=IHS+Markit, ComponentLink2Description=https://datasheet.ciiva.com/7941/1686128-7941719.pdf?src-supplier=Element14, ComponentLink2URL=https://datasheet.ciiva.com/7941/1686128-7941719.pdf?src-supplier=Element14, ComponentLink3Description=https://datasheet.ciiva.com/46385/444164-46385020.pdf?src-supplier=Element14, ComponentLink3URL=https://datasheet.ciiva.com/46385/444164-46385020.pdf?src-supplier=Element14, ComponentLink4Description=https://datasheet.ciiva.com/2456/pyu-r-int-thick-7-2456976.pdf?src-supplier=Digikey, ComponentLink4URL=https://datasheet.ciiva.com/2456/pyu-r-int-thick-7-2456976.pdf?src-supplier=Digikey, ComponentLink5Description=https://datasheet.ciiva.com/2456/pyu-r-int-thick-7-2456977.pdf?src-supplier=Digikey, ComponentLink5URL=https://datasheet.ciiva.com/2456/pyu-r-int-thick-7-2456977.pdf?src-supplier=Digikey, ComponentLink6Description=https://datasheet.ciiva.com/2456/pyu-r-int-thick-7-2456975.pdf?src-supplier=Digikey, ComponentLink6URL=https://datasheet.ciiva.com/2456/pyu-r-int-thick-7-2456975.pdf?src-supplier=Digikey, ComponentLink7Description=https://datasheet.ciiva.com/16850/rc0805-16850409.pdf?src-supplier=Future+Electronics, ComponentLink7URL=https://datasheet.ciiva.com/16850/rc0805-16850409.pdf?src-supplier=Future+Electronics, Construction=Chip, JESD-609 Code=e3, Manufacturer Part Number=RC0805FR-071KL, Mounting Technology="Surface Mount", Packaging="Tape and Reel", Pins=2, Pricing="5000=0.00408, 10000=0.00396, 15000=0.00374, 25000=0.00356 (USD)", Reach SVHC Compliant=Yes, RoHS=Yes, RoHS Compliant=Yes, Stock=465000, Supplier=Digikey, Technology="METAL GLAZE/THICK FILM", Terminal Finish=Nickel, Termination=Wraparound
R4 R5: "Fixed Resistor, Metal Glaze/thick Film, 0.125W, 10000ohm, 150V, 5% +/-Tol, 100ppm/Cel, Surface Mount, 0805", Case/Package=0805, Manufacturer=Yageo, Max Operating Temperature=155°C, Min Operating Temperature=-55°C, Package Height=0.5mm, Package Length=2mm, Package Shape=Rectangular, Package Width=1.25mm, Power=125mW, Rated Temperature=70°C, Resistor Type="FIXED RESISTOR", Supplier Part Number=80K7383, Temperature Coefficient (ppm/Cel)=100, Tolerance=5%, Working Voltage=150V, Additional Feature="LASER TRIMMABLE", Category="Chip SMD Resistors", ComponentLink1Description=https://datasheet.ciiva.com:443/pdfs/VipMasterIC/IC/YAGO/YAGO-S-A0008145938/YAGO-S-A0008145938-1.pdf?src-supplier=IHS+Markit, ComponentLink1URL=https://datasheet.ciiva.com:443/pdfs/VipMasterIC/IC/YAGO/YAGO-S-A0008145938/YAGO-S-A0008145938-1.pdf?src-supplier=IHS+Markit, ComponentLink2Description=https://datasheet.ciiva.com/7983/444164-7983765.pdf?src-supplier=Element14, ComponentLink2URL=https://datasheet.ciiva.com/7983/444164-7983765.pdf?src-supplier=Element14, ComponentLink3Description=https://datasheet.ciiva.com/7941/444164-7941870.pdf?src-supplier=Element14, ComponentLink3URL=https://datasheet.ciiva.com/7941/444164-7941870.pdf?src-supplier=Element14, ComponentLink4Description=https://datasheet.ciiva.com/7941/444164-7941871.pdf?src-supplier=Element14, ComponentLink4URL=https://datasheet.ciiva.com/7941/444164-7941871.pdf?src-supplier=Element14, Construction=Chip, JESD-609 Code=e3, Manufacturer Part Number=RC0805JR-0710KL, Mounting Technology="Surface Mount", Packaging="Tape and Reel", Pins=2, Pricing="1=0.014, 30=0.011, 50=0.01, 100=0.008 (USD)", Reach SVHC Compliant=Yes, RoHS=Yes, RoHS Compliant=Yes, Stock=270, Supplier=Avnet, Technology="METAL GLAZE/THICK FILM", Terminal Finish=Nickel, Termination=Wraparound
U1: library part CMP-12756-000035-1, "IC REG LINEAR 3.3V 600MA SOT25", Case/Package=SOT-23-5, Dropout Voltage=250mV, Max Input Voltage=6V, Max Operating Temperature=85°C, Max Output Current=600mA, Min Input Voltage=2.5V, Min Operating Temperature=-40°C, Output Voltage=3.3V, Package Quantity=1, Quiescent Current=55uA, Accuracy=1.5%, Height=1.3mm, Lead Free="Lead Free", Length=3.1mm, Mount="Surface Mount", Number of Outputs=1, Number of Pins=5, Number of Regulators=1, Output Current=600mA, Output Type=Fixed, Packaging="Tape and Reel", Polarity=Positive, Width=1.7mm
U2: library part TP4056_chip
U3: "Bluetooth, WiFi 802.11b/g/n, Bluetooth v4.2 +EDR, Class 1, 2 and 3 Transceiver Module 2.4GHz ~ 2.5GHz Antenna Not Included, U.FL Surface Mount"

## Via types
v1: diameter 0.6, hole 0.3, Top Layer to Bottom Layer, 38 vias

## Nets (pads, with @x,y where several pads share a name; then routed paths per layer and width w, separated by ;. In a path a pad name is that pad's centre, name@x,y a point inside that pad or via, vN(x,y) a via of type N, cw(c..) or ccw(c..) an arc to the next point about the centre after c; other vN are vias at no path point)
+3V3: C1.2 C5.2 C6.2 PB1.4 R5.2 U1.5 U3.2 | length 70.4
  Top Layer w0.4: R5.2 34.687,36.576 36.838,38.727 39.686,38.727 40.448,39.489 56.457,39.489 56.977,40.009 56.977,40.594 57.277,40.894 57.277,42.291 v1(56.642,42.926) ; v1(60.706,21.082) 60.833,21.082 61.25,20.665 C5.2 61.25,16.789 C6.2 61.145,16.684 U1.5 61.661,14.158 63.5,12.319 63.5,10.667 61.491,8.658 C1.2
  Bottom Layer w0.4: v1(56.642,42.926) 56.642,25.146 v1(60.706,21.082)
+5: C3.1 J3.A9 J3.B9 R2.1 U2.4 U2.8 | length 52
  Top Layer w0.254: J3.B9@36.58,7.65 J3.B9@36.655,7.726 ; 37.021,8.824 37.272,8.824 v1(37.338,8.89)
  Top Layer w0.4: J3.B9@36.655,7.726 36.655,8.458 37.021,8.824
  Top Layer w0.5: J3.B9@36.58,7.65 36.58,5.838 37.084,5.334 39.116,5.334 39.62,5.838 39.62,7.65 39.77,7.8 39.77,8.655 40.259,9.144 42.926,9.144 43.688,8.382 43.688,7.388 44.345,6.731 ; U2.8 44.345,6.731 ; U2.4 52.959,10.541 54.102,9.398 54.102,7.293 52.397,5.588 49.276,5.588 48.895,5.207 46.488,5.207 46.443,5.162 46.045,5.162 C3.1 44.693,4.837 44.345,5.185 44.345,6.731
  Bottom Layer w0.254: 30.823,5.486 30.923,5.586
  Bottom Layer w0.4: R2.1 25.215,5.175 26.308,5.175 26.719,5.586 30.923,5.586 36.832,5.586 37.338,6.092 v1(37.338,8.89)
EN: C8.2 J4.03 PB2.3 PB2.4 R5.1 U3.3 | length 72
  Top Layer w0.254: v1(26.543,36.957) 26.924,36.576 R5.1 ; PB2.3 PB2.4 38.357,17.871 C8.2 C8.2@38.897,17.423 ; J4.03 35.387,43.099 55.072,43.099 56.156,42.015 56.156,41.043 U3.3@56.007,40.894
  Bottom Layer w0.254: PB2.3 28.448,18.122 28.448,35.052 v1(26.543,36.957) 26.543,40.894 28.829,43.18 33.274,43.18 33.782,43.688 J4.03
GND: C1.1 C2.1 C3.2 C4.1 C5.1 C6.1 C7.1 C8.1 D3.K J2.2 J3.A12 J3.B12 J4.05 J5.02 J6.04 J7.05 J8.04 PB2.1 PB2.2 PB3.1 PB3.2 R1.1 R4.1 S1.N U1.2 U2.1 U2.3 U3.1 U3.15 U3.38 U3.39_1 U3.39_2 U3.39_3 U3.39_4 U3.39_5 U3.39_6 U3.39_7 U3.39_8 U3.39_9 | length 248.4
  Top Layer w0.3: v1(58.42,42.926) 58.42,40.978 U3.1
  Top Layer w0.4: J8.04 22.937,27.101 22.937,37.542 J6.04 ; J2.2 30.157,9.017 32.385,9.017 32.639,9.271 34.063,9.271 34.363,9.571 v1(34.417,9.571) 35.35,8.638 35.35,4.909 36.195,4.064 39.878,4.064 40.85,5.036 40.85,6.03 ; PB2.1 30.405,20.919 30.405,24.674 PB3.2 PB3.1 36.905,24.674 36.905,20.919 PB2.2 37.899,19.671 C8.1@39.243,19.671 ; C4.1@34.809,11.43 34.936,11.303 v1(36.322,11.303) ; v1(38.862,38.1) 41.028,38.1 U3.15@41.037,38.109 ; v1(38.862,39.878) 27.976,39.878 27.827,39.729 C7.1 27.802,38.608 J6.04 ; C8.1 39.74,20.066 R4.1 41.368,18.703 41.656,18.415 S1.N@41.656,15.621 ; J3.A12@40.85,7.65 40.85,6.03 ; U3.39_9@48.674,32.054 U3.39_9@48.674,32.097 ; J5.02 49.784,45.571 49.381,45.974 39.562,45.974 39.439,46.097 29.059,46.097 28.702,45.74 J4.05 24.892,44.704 D3.K 23.368,39.481 24.003,38.846 J6.04 ; U2.1 52.484,6.731 52.805,7.051 52.833,7.023 52.924,7.023 52.986,7.085 53.078,7.085 53.467,7.474 53.467,8.763 52.959,9.271 U2.3 ; U3.39_4@50.997,35.229 49.212,35.229 U3.39_8@49.212,33.394 ; v1(58.166,36.322) 57.073,35.229 52.882,35.229 52.882,33.394 U3.39_8@49.212,33.394 ; U1.2 61.714,13.208 62.865,12.057 62.865,10.9 62.633,10.668 61.341,10.668 60.071,9.398 60.071,6.878 60.077,6.872 ; C1.1 61.327,6.872 60.077,6.872 ; 40.85,6.03 41.428,5.452 42.923,5.452 44.963,3.412 45.345,3.412 C3.2 45.985,3.302 49.403,3.302 J7.05 50.673,4.826 52.451,4.826 54.356,6.731 v1(54.864,6.731) 56.235,6.731 R1.1 57.46,6.705 ; U3.39_8@49.212,33.394 49.212,31.559 55.944,31.559 58.547,28.956 58.547,20.332 59.45,19.429 C5.1 59.45,16.789 C6.1 57.404,16.764 56.007,15.367 56.007,11.22 57.46,9.767 57.46,6.705 ; 57.46,6.705 58.659,6.705 C2.1 60.077,6.872
  Bottom Layer w0.3: J5.02 50.781,45.574 57.931,45.574 58.547,44.958 58.547,43.053 v1(58.42,42.926)
  Bottom Layer w0.4: v1(34.417,9.571) 34.455,9.609 35.263,9.609 36.276,10.622 36.276,11.257 v1(36.322,11.303) ; PB3.1 38.227,25.996 38.227,37.465 v1(38.862,38.1) v1(38.862,39.878) ; v1(52.832,6.985) 54.516,6.985 54.77,6.731 v1(54.864,6.731) ; v1(58.166,36.322) 58.166,36.376 58.547,36.757 58.42,36.884 v1(58.42,42.926)
GPIO_0: C7.2 J4.04 PB3.3 PB3.4 S1.P U3.25 | length 63.2
  Top Layer w0.254: C7.2@29.548,38.662 C7.2 30.582,38.583 v1(30.607,38.608) ; PB3.4 PB3.3 ; v1@31.115,42.545 J4.04@31.115,44.577 ; U3.25@42.037,23.894 42.037,21.209 42.545,20.701 42.545,17.907 43.053,17.399 44.047,17.399 44.196,17.25 S1.P@44.196,15.621
  Bottom Layer w0.254: v1(30.988,42.545) 30.734,42.291 30.734,38.608 30.734,36.576 29.21,35.052 29.21,29.613 29.359,29.464 30.369,29.464 PB3.4 29.224,27.993 29.224,18.528 29.718,18.034 32.131,18.034 35.864,14.301 43.738,14.301 43.982,14.546 43.982,15.026 S1.P
NetC4_2: C4.2 J1.2 J2.1 U2.5 | length 24.7
  Top Layer w0.4: J2.1 J2.1@31.311,10.287 ; 31.099,11.319 31.21,11.43
  Top Layer w0.5: J1.2 25.172,11.013 25.843,11.684 30.734,11.684 31.099,11.319 J2.1 ; 31.21,11.43 C4.2@33.009,11.43 ; J2.1@31.311,10.287 44.323,10.287 44.577,10.541 U2.5
NetD1_1: D1.1 D2.A R2.2 | length 9.8
  Top Layer w0.254: D2.A 29.616,4.47 29.616,5.486 30.226,6.096 31.601,6.096 31.75,5.947 31.75,5.19 D1.1
  Bottom Layer w0.254: R2.2 27.898,2.752 D2.A
NetD1_2: D1.2 U2.7 | length 21.8
  Top Layer w0.254: v1(30.353,2.794) 30.548,2.989 D1.2 ; v1(44.396,8.128) 44.459,8.064 45.976,8.064 U2.7
  Bottom Layer w0.254: v1(30.353,2.794) 32.129,2.794 32.51,2.413 39.624,2.413 40.767,3.556 40.767,5.947 40.916,6.096 43.307,6.096 44.396,7.185 v1(44.396,8.128)
NetD2_K: D2.K U2.6 | length 21.7
  Top Layer w0.254: D2.K 28.575,5.969 v1(28.575,6.731) ; v1(36.576,9.398) 36.67,9.398 36.924,9.652 43.942,9.652 44.323,9.271 U2.6
  Bottom Layer w0.254: v1(28.575,6.731) 30.861,9.017 36.195,9.017 v1(36.576,9.398)
NetD3_A: D3.A R3.2 | length 3.1
  Top Layer w0.254: D3.A 26.06,43.028 26.06,42.139 26.819,41.38 26.841,41.402 R3.2@27.771,41.402
NetR1_2: R1.2 U2.2 | length 5.6
  Top Layer w0.254: U2.2 v1(52.578,8.001) ; v1(54.991,8.636) 56.092,8.636 R1.2
  Bottom Layer w0.254: v1(52.578,8.001) 54.356,8.001 v1(54.991,8.636)
NetR3_1: R3.1 U3.13 | length 15.1
  Top Layer w0.254: R3.1@29.871,41.402 40.386,41.402 41.402,42.418 42.799,42.418 43.18,42.037 43.18,41.021 U3.13@43.307,40.894
PB: PB1.2 R4.2 U3.26 | length 32.9
  Top Layer w0.254: U3.26@43.307,23.894 43.468,23.733 R4.2
  Bottom Layer w0.254: PB1.2 32.167,36.739 30.099,34.671 30.099,31.75 32.131,29.718 32.131,23.136 32.28,22.987 37.719,22.987 38.989,21.717 v1@43.434,21.717
  other v1: 43.468,21.713
RX_02: J6.02 U3.17 | length 17.8
  Top Layer w0.254: J6.02 26.035,33.528 26.797,34.29 37.973,34.29 39.259,35.576 U3.17
RX_03(GSM): J7.03 U3.11 | length 66.6
  Top Layer w0.254: U3.11@45.847,40.894 45.847,42.269 45.996,42.418 v1(46.228,42.418) ; J7.03@54.483,3.302 54.483,4.445 54.991,4.953 64.36,4.953 65.024,5.617 v1@65.024,17.383
  Bottom Layer w0.254: v1(46.228,42.418) 45.72,42.418 44.958,41.656 44.958,26.035 51.168,19.825 62.598,19.825 64.67,17.753 64.705,17.753 v1(65.024,17.434)
RXD0: J4.01 U3.34 | length 40.1
  Top Layer w0.254: U3.34@53.467,23.894 53.467,22.098 v1(54.102,21.463)
  Bottom Layer w0.254: J4.01 42.291,44.704 43.942,43.053 46.841,43.053 46.99,42.904 46.99,37.053 47.663,36.38 54.254,36.38 54.403,36.231 54.403,21.764 v1(54.102,21.463)
SCL: J5.03 J8.02 U3.9 | length 45.9
  Top Layer w0.254: J8.02 24.344,21.042 24.344,21.852 25.908,23.416 25.908,24.428 28.617,27.136 38.439,27.136 v1(39.116,27.813) ; v1(43.688,32.004) 48.387,36.703 48.387,37.571 v1(48.398,37.581) ; U3.9 48.387,40.951 v1(48.387,42.418)
  Bottom Layer w0.254: v1(39.116,27.813) 42.672,27.813 43.688,28.829 v1(43.688,32.004) ; v1(48.398,37.581) 48.387,37.592 v1(48.387,42.418) 49.463,43.494 50.248,43.494 51.258,44.504 52.251,44.504 J5.03
SDA: J5.04 J8.03 U3.8 | length 45.6
  Top Layer w0.254: J8.03 28.448,27.686 38.1,27.686 v1(39.116,28.702) ; v1(43.434,33.401) 48.641,38.608 v1(49.53,38.608) ; U3.8 49.657,40.951 v1(49.657,42.545)
  Bottom Layer w0.254: v1(39.116,28.702) 42.418,28.702 42.926,29.21 42.926,32.893 v1(43.434,33.401) ; v1(49.53,38.608) 49.53,42.324 49.657,42.451 v1(49.657,42.545) 51.62,42.545 53.652,44.577 J5.04
TX_02: J6.03 U3.27 | length 51.1
  Top Layer w0.254: J6.03 25.995,36.068 v1(27.138,34.925) ; U3.27 44.577,23.851 v1(44.577,21.59)
  Bottom Layer w0.254: v1(27.138,34.925) 28.067,33.996 28.067,16.256 30.48,13.843 44.958,13.843 45.339,14.224 45.339,20.828 v1(44.577,21.59)
TX_03(GSM): J7.04 U3.12 | length 66.7
  Top Layer w0.254: U3.12@44.577,40.894 44.577,42.269 v1(44.726,42.418) ; J7.04@51.991,3.302 54.277,5.588 64.135,5.588 64.389,5.842 64.389,17.018 v1(64.135,17.272)
  Bottom Layer w0.254: v1(44.726,42.418) 44.242,41.934 44.242,25.989 51.054,19.177 62.23,19.177 v1(64.135,17.272)
TXD0: J4.02 U3.35 | length 44.7
  Top Layer w0.254: U3.35@54.737,23.894 54.483,23.64 54.483,22.098 v1(55.118,21.463)
  Bottom Layer w0.254: J4.02 36.322,45.006 36.703,45.387 36.703,45.466 36.957,45.72 42.418,45.72 44.704,43.434 47.349,43.434 47.498,43.285 47.498,37.084 47.752,36.83 54.737,36.83 55.118,36.449 v1(55.118,21.463)
VCC: C2.2 J1.1 J5.01 J6.01 J7.01 J8.01 U1.1 U1.3 | length 139.1
  Top Layer w0.4: U1.3 56.769,12.258 ; U1.1 56.918,14.158 56.769,14.009 56.769,12.258 ; C2.2 58.635,8.864 58.635,9.613 v1(59.055,10.033) ; v1@59.049,10.039 58.995,10.039 58.901,10.133 58.894,10.133 56.769,12.258
  Bottom Layer w0.4: J5.01@47.222,44.599 J5.01 ; J7.01@59.261,3.556 J7.01 J7.01@59.817,3.556
  Bottom Layer w0.5: J6.01 J6.01@24.13,30.861 ; J1.1 J1.1@25.214,13.081 ; 26.651,13.227 26.797,13.374 ; J5.01@47.222,44.599 47.571,44.947 47.571,45.681 47.99,46.101 65.532,46.101 66.548,45.085 66.548,10.287 66.294,10.033 v1(59.055,10.033)
  Bottom Layer w0.7: J8.01 26.797,18.288 ; J6.01@24.13,30.861 25.908,30.861 26.797,29.972 26.797,18.288 ; J1.1@25.214,13.081 26.504,13.081 ; 26.651,13.227 26.504,13.081 ; 26.797,13.374 26.797,18.288 ; J7.01 59.563,9.525 v1(59.055,10.033) 57.785,10.033 54.737,13.081 26.504,13.081
pads on no net: J1.3 J1.G1 J1.G2 J3.A5 J3.B5 J3.S1 J3.S2 J3.S3 J3.S4 J5.05 J5.06 J5.07 J5.08 J7.02 PB1.1 PB1.3 U1.4 U2.9 U3.4 U3.5 U3.6 U3.7 U3.10 U3.14 U3.16 U3.18 U3.19 U3.20 U3.21 U3.22 U3.23 U3.24 U3.28 U3.29 U3.30 U3.31 U3.32 U3.33 U3.36 U3.37

## Polygon pours and split planes (outlines as drawn)
GND on Top Layer "GND_L01_P000" (solid, pour order 0): 22.31,1.736 22.31,46.736 67.31,46.736 67.31,1.736
GND on Bottom Layer "GND_L02_P001" (solid, pour order 1): 22.31,1.736 22.31,46.736 67.31,46.736 67.31,1.736

## Keep-outs
Keep-Out Layer:
  the board outline again, w0.254

## Silkscreen, mask and mechanical layers (free items; w line width, h text height)
Top Overlay:
  lines w0.18: 45.974,17.145 56.388,17.145
  text "URAT" at 39.016,43.08 h0.5 r180
  text "Emg_PB" at 28.167,33.287 h0.5
  text "GPS" at 25.5,31.65 h0.5 r270
  text "Boot" at 27.913,26.516 h0.5
  text "Heart Rate" at 25.754,22.379 h0.5 r270
  text "ESP-32" at 46.963,22.071 h0.5
  text "INNOVATECH" at 45.974,17.421 h1.8
  text "ENTC - 23" at 47.779,15.205 h1.5
  text "Reset" at 32.231,14.451 h0.5
Bottom Overlay:
  text "MPU6050" at 53.948,42.826 h0.5 r180
  text "Buzzer" at 44.477,16.991 h0.5
  text "Battery 3.7V" at 33.02,13.081 h0.5
  text "GSM" at 55.399,5.18 h0.5

## Text inside footprints (layer, text, board x,y; h text height)
U3: Mechanical 13 "ANTENNA" at 62.237,38.401 h1.78 r270